# EAGLE board headstage-mech-test (EAGLE 6.5.0)

Size 39.62 x 39.62 mm. Coordinates in mm from the lower left corner, seen from the top.
Outline: circle at 19.81,19.81 radius 19.81
Copper layers (1*16): Top 0.0356mm / dielectric 1.5011mm / Bottom 0.0356mm
Design rules "ohs-park-2-layer": minimum track width 6mil, minimum drill 13mil, track to track 6mil, track to pad 6mil, pad to pad 6mil, via to via 6mil, smd to smd 6mil, copper to edge 15mil, drill to drill 6mil, minimum pad ring 7mil, minimum via ring 7mil, stop-mask expansion 4mil, vias tented up to drill 100mil, thermal gap 10mil
Net classes: 1 thick: width 0.102 mm
Holes 1.27 mm at 10.31,28.7 28.7,29.31 29.31,10.92 10.92,10.31

## Footprints (pad centres in the part's own frame; a part is rotated, then mirrored left to right if it is on the bottom)
DF40-70REC = smd 0.2 x 1.14: 1 -6.8,1.17; 2 -6.4,1.17; 3 -6,1.17; 4 -5.6,1.17; 5 -5.2,1.17; 6 -4.8,1.17; 7 -4.4,1.17; 8 -4,1.17; 9 -3.6,1.17; 10 -3.2,1.17; 11 -2.8,1.17; 12 -2.4,1.17; 13 -2,1.17; 14 -1.6,1.17; 15 -1.2,1.17; 16 -0.8,1.17; 17 -0.4,1.17; 18 0,1.17; 19 0.4,1.17; 20 0.8,1.17; 21 1.2,1.17; 22 1.6,1.17; 23 2,1.17; 24 2.4,1.17; 25 2.8,1.17; 26 3.2,1.17; 27 3.6,1.17; 28 4,1.17; 29 4.4,1.17; 30 4.8,1.17; 31 5.2,1.17; 32 5.6,1.17; 33 6,1.17; 34 6.4,1.17; 35 6.8,1.17; 36 6.8,-1.17; 37 6.4,-1.17; 38 6,-1.17; 39 5.6,-1.17; 40 5.2,-1.17; 41 4.8,-1.17; 42 4.4,-1.17; 43 4,-1.17; 44 3.6,-1.17; 45 3.2,-1.17; 46 2.8,-1.17; 47 2.4,-1.17; 48 2,-1.17; 49 1.6,-1.17; 50 1.2,-1.17; 51 0.8,-1.17; 52 0.4,-1.17; 53 0,-1.17; 54 -0.4,-1.17; 55 -0.8,-1.17; 56 -1.2,-1.17; 57 -1.6,-1.17; 58 -2,-1.17; 59 -2.4,-1.17; 60 -2.8,-1.17; 61 -3.2,-1.17; 62 -3.6,-1.17; 63 -4,-1.17; 64 -4.4,-1.17; 65 -4.8,-1.17; 66 -5.2,-1.17; 67 -5.6,-1.17; 68 -6,-1.17; 69 -6.4,-1.17; 70 -6.8,-1.17
DF40-70HEAD = smd 0.23 x 0.66: 1 -6.8,-1.685; 2 -6.4,-1.685; 3 -6,-1.685; 4 -5.6,-1.685; 5 -5.2,-1.685; 6 -4.8,-1.685; 7 -4.4,-1.685; 8 -4,-1.685; 9 -3.6,-1.685; 10 -3.2,-1.685; 11 -2.8,-1.685; 12 -2.4,-1.685; 13 -2,-1.685; 14 -1.6,-1.685; 15 -1.2,-1.685; 16 -0.8,-1.685; 17 -0.4,-1.685; 18 0,-1.685; 19 0.4,-1.685; 20 0.8,-1.685; 21 1.2,-1.685; 22 1.6,-1.685; 23 2,-1.685; 24 2.4,-1.685; 25 2.8,-1.685; 26 3.2,-1.685; 27 3.6,-1.685; 28 4,-1.685; 29 4.4,-1.685; 30 4.8,-1.685; 31 5.2,-1.685; 32 5.6,-1.685; 33 6,-1.685; 34 6.4,-1.685; 35 6.8,-1.685; 36 6.8,1.685; 37 6.4,1.685; 38 6,1.685; 39 5.6,1.685; 40 5.2,1.685; 41 4.8,1.685; 42 4.4,1.685; 43 4,1.685; 44 3.6,1.685; 45 3.2,1.685; 46 2.8,1.685; 47 2.4,1.685; 48 2,1.685; 49 1.6,1.685; 50 1.2,1.685; 51 0.8,1.685; 52 0.4,1.685; 53 0,1.685; 54 -0.4,1.685; 55 -0.8,1.685; 56 -1.2,1.685; 57 -1.6,1.685; 58 -2,1.685; 59 -2.4,1.685; 60 -2.8,1.685; 61 -3.2,1.685; 62 -3.6,1.685; 63 -4,1.685; 64 -4.4,1.685; 65 -4.8,1.685; 66 -5.2,1.685; 67 -5.6,1.685; 68 -6,1.685; 69 -6.4,1.685; 70 -6.8,1.685 | smd 0.35 x 0.66: M1 -7.275,-1.685; M2 7.275,-1.685; M3 7.275,1.685; M4 -7.275,1.685
0201 = smd 0.432 x 0.432: 1 -0.394,0; 2 0.394,0
0402 = smd 0.686 x 0.762: 1 -0.533,0; 2 0.533,0
DF40-20HEAD = smd 0.23 x 0.66: 1 -1.8,-1.685; 2 -1.4,-1.685; 3 -1,-1.685; 4 -0.6,-1.685; 5 -0.2,-1.685; 6 0.2,-1.685; 7 0.6,-1.685; 8 1,-1.685; 9 1.4,-1.685; 10 1.8,-1.685; 11 1.8,1.685; 12 1.4,1.685; 13 1,1.685; 14 0.6,1.685; 15 0.2,1.685; 16 -0.2,1.685; 17 -0.6,1.685; 18 -1,1.685; 19 -1.4,1.685; 20 -1.8,1.685 | smd 0.35 x 0.66: M1 -2.275,-1.685; M2 2.275,-1.685; M3 2.275,1.685; M4 -2.275,1.685
DF40-20REC = smd 0.2 x 1.14: 1 -1.8,1.17; 2 -1.4,1.17; 3 -1,1.17; 4 -0.6,1.17; 5 -0.2,1.17; 6 0.2,1.17; 7 0.6,1.17; 8 1,1.17; 9 1.4,1.17; 10 1.8,1.17; 11 1.8,-1.17; 12 1.4,-1.17; 13 1,-1.17; 14 0.6,-1.17; 15 0.2,-1.17; 16 -0.2,-1.17; 17 -0.6,-1.17; 18 -1,-1.17; 19 -1.4,-1.17; 20 -1.8,-1.17
RHD2164_COB_MECH = smd 7.722 x 4.674: CENTER 0,0
TESTPOINT_SMALL = drill 0.813 octagon: 1 0,0
OMNETICS_PZN-06-AA = smd 0.381 x 0.762: B1 0.635,-1.016; B2 0,-1.016; B3 -0.635,-1.016 | smd 0.381 x 1.016: T1 0.635,-2.159; T2 0,-2.159; T3 -0.635,-2.159
ADXL335 = smd 0.61 x 0.305: COM1 -1.775,-0.3; NC1 -1.775,1; NC2 -1.775,-0.95; NC3 1.775,-1; NC4 1.775,0.3; ST -1.775,0.35; XOUT 1.775,0.95; YOUT 1.775,-0.35 | smd 0.305 x 0.61: COM2 -1,-1.775; COM3 -0.35,-1.775; COM4 0.3,-1.775; NC5 1,1.775; NC6 -0.95,1.775; VS1 0.35,1.775; VS2 -0.3,1.775; ZOUT 0.95,-1.775
TSSOP-16 = smd 0.348 x 1.397: 1 -2.273,-2.814; 2 -1.623,-2.815; 3 -0.973,-2.815; 4 -0.323,-2.815; 5 0.327,-2.815; 6 0.977,-2.815; 7 1.627,-2.815; 8 2.277,-2.815; 9 2.277,2.825; 10 1.627,2.825; 11 0.977,2.825; 12 0.327,2.825; 13 -0.323,2.825; 14 -0.973,2.825; 15 -1.623,2.825; 16 -2.273,2.825

## Placement (x,y rotation side)
AIN_A  DF40REC  [DF40-70REC]  22.86,32.87 0 bottom
AIN_B  DF40REC  [DF40-70REC]  16.76,6.76 180 bottom
ATHRU_A_BOT  DF40REC  [DF40-70REC]  6.76,22.86 270 bottom
ATHRU_A_TOP  DF40HEAD  [DF40-70HEAD]  6.76,22.86 270 top
ATHRU_B_BOT  DF40REC  [DF40-70REC]  32.87,16.76 90 bottom
ATHRU_B_TOP  DF40HEAD  [DF40-70HEAD]  32.87,16.76 90 top
C1  10n  [0201]  14.02,21.13 0 bottom
C2  .1uF  [0402]  19.76,23.32 0 top
C3  .1uF  [0402]  22.35,26.57 270 top
C4  .1uF  [0402]  19.76,26.06 180 top
C5  .1uF  [0402]  19.76,24.69 180 top
C6  .1uF  [0402]  16,20.98 0 top
C7  10n  [0201]  26.67,18.59 180 bottom
C8  .1uF  [0402]  19.86,16.31 180 top
DIO  DF40HEAD  [DF40-20HEAD]  32.87,29.41 90 top
DTHRU_BOT  DF40REC  [DF40-20REC]  10.21,32.87 0 bottom
DTHRU_TOP  DF40HEAD  [DF40-20HEAD]  10.21,32.87 180 top
E$1  [RHD2164_COB_MECH]  17.02,25.04 0 bottom
E$2  [RHD2164_COB_MECH]  22.61,14.58 0 bottom
GND  GND  [TESTPOINT_SMALL]  36.83,27.18 0 top
GND.  GND  [TESTPOINT_SMALL]  2.79,12.45 0 top
MECH1  DF40HEAD  [DF40-70HEAD]  16.76,6.76 0 top
MECH2  DF40HEAD  [DF40-70HEAD]  22.86,32.87 180 top
MECH3  DF40HEAD  [DF40-20HEAD]  29.41,6.76 0 top
MECH4  DF40HEAD  [DF40-20HEAD]  6.76,10.21 270 top
PLT  PZN-06  [OMNETICS_PZN-06-AA]  2.13,19.2 0 top
R1  100  [0201]  22.91,21.95 0 top
R2  100  [0201]  25.15,21.95 0 top
R3  100  [0201]  27.18,21.95 0 top
R4  0  [0402]  12.09,11.63 180 bottom
R5  100k  [0201]  9.65,21.03 270 bottom
R6  100k  [0201]  10.62,21.03 270 bottom
R7  100k  [0201]  11.58,21.03 270 bottom
REF1  REF  [TESTPOINT_SMALL]  7.26,6.05 0 top
REF2  REF  [TESTPOINT_SMALL]  32.36,33.58 0 top
U1  ADXL335  [ADXL335]  15.95,24.69 0 top
U2  74HC4053  [TSSOP-16]  13.31,16.05 0 bottom
VCC1  VCC  [TESTPOINT_SMALL]  37.59,25.25 0 top
VCC2  VCC  [TESTPOINT_SMALL]  2.03,14.38 0 top

## Library data of the parts
AIN_A AIN_B ATHRU_A_BOT ATHRU_A_TOP ATHRU_B_BOT ATHRU_B_TOP C4-C6 DIO DTHRU_BOT DTHRU_TOP E$1 E$2 GND GND. MECH1-MECH4 PLT R1-R3 REF1 REF2 U1 U2 VCC1 VCC2 = jonnew
C1 C2 C7 C8 R4-R7 = RHD2000_eval_board
C3 = headstage

## Nets
AGND_THRU_1: ATHRU_A_BOT.34 ATHRU_A_BOT.35 ATHRU_A_TOP.34 ATHRU_A_TOP.35
AGND_THRU_2: ATHRU_A_BOT.69 ATHRU_A_BOT.70 ATHRU_A_TOP.69 ATHRU_A_TOP.70
AGND_THRU_3 [thick]: ATHRU_B_BOT.34 ATHRU_B_BOT.35 ATHRU_B_TOP.34 ATHRU_B_TOP.35
AGND_THRU_4: ATHRU_B_BOT.69 ATHRU_B_BOT.70 ATHRU_B_TOP.69 ATHRU_B_TOP.70
AUXOUT_A_THRU: DTHRU_BOT.4 DTHRU_TOP.4
AUXOUT_B: DIO.4
AUXOUT_B_THRU: DTHRU_BOT.5 DTHRU_TOP.5
BATH [thick]: PLT.B1 U2.3
CS+: DIO.12 R1.2
CS+_THRU: DTHRU_BOT.12 DTHRU_TOP.12
CS-: DIO.11 R1.1
CS-_THRU: DTHRU_BOT.11 DTHRU_TOP.11
DGND_THRU: DTHRU_BOT.1 DTHRU_BOT.2 DTHRU_BOT.3 DTHRU_BOT.6 DTHRU_BOT.7 DTHRU_BOT.8 DTHRU_BOT.9 DTHRU_TOP.1 DTHRU_TOP.2 DTHRU_TOP.3 DTHRU_TOP.6 DTHRU_TOP.7 DTHRU_TOP.8 DTHRU_TOP.9
ELEC_TEST1: U2.14
ELEC_TEST2: U2.15
GND [thick]: AIN_A.34 AIN_A.35 AIN_A.69 AIN_A.70 AIN_B.34 AIN_B.35 AIN_B.69 AIN_B.70 C1.2 C2.2 C3.2 C4.1 C5.1 C6.1 C7.2 C8.2 DIO.1 DIO.2 DIO.3 DIO.5 DIO.6 DIO.7 GND.1 GND..1 PLT.B3 R4.1 R5.1 R6.1 R7.1 U1.COM1 U1.COM2 U1.COM3 U1.COM4 U1.ST U2.6 U2.7 U2.8
MISO1+: DIO.20
MISO1+_THRU: DTHRU_BOT.18 DTHRU_TOP.18
MISO1-: DIO.19
MISO1-_THRU: DTHRU_BOT.17 DTHRU_TOP.17
MISO2+: DIO.18
MISO2+_THRU: DTHRU_BOT.20 DTHRU_TOP.20
MISO2-: DIO.17
MISO2-_THRU: DTHRU_BOT.19 DTHRU_TOP.19
MOSI+: DIO.16 R3.2
MOSI+_THRU: DTHRU_BOT.16 DTHRU_TOP.16
MOSI-: DIO.15 R3.1
MOSI-_THRU: DTHRU_BOT.15 DTHRU_TOP.15
N$1 [thick]: C7.1
N$2: AIN_A.38
N$3: AIN_A.39
N$4: AIN_A.40
N$5: AIN_A.41
N$6: AIN_A.42
N$7: AIN_A.32
N$8: AIN_A.31
N$9: AIN_A.30
N$10: AIN_A.29
N$11: AIN_B.38
N$12: AIN_A.28
N$13: AIN_A.27
N$14: AIN_A.26
N$15: AIN_A.25
N$16: AIN_A.24
N$17: AIN_A.23
N$18: AIN_A.22
N$19: AIN_A.21
N$20: AIN_A.20
N$21: AIN_A.19
N$22: AIN_A.18
N$23: AIN_A.17
N$24: AIN_A.16
N$25: AIN_A.15
N$26: AIN_A.14
N$27: AIN_A.13
N$28: AIN_A.12
N$29: AIN_A.11
N$30: AIN_A.10
N$31: AIN_A.9
N$32: AIN_A.8
N$33: AIN_A.7
N$34: AIN_A.6
N$35: AIN_B.39
N$36: AIN_B.40
N$37: AIN_B.41
N$38: AIN_B.42
N$39: AIN_B.43
N$40: AIN_B.44
N$41: AIN_A.5
N$42 [thick]: C1.1
N$43: AIN_A.4
N$44: AIN_A.3
N$45: AIN_A.2
N$46: AIN_A.33
N$47: AIN_B.45
N$48: AIN_B.46
N$49: AIN_B.47
N$50: AIN_B.48
N$51: AIN_B.49
N$52: AIN_B.50
N$53: AIN_B.51
N$54: AIN_B.52
N$55: AIN_B.53
N$56: AIN_B.54
N$57: AIN_B.55
N$58: AIN_B.56
N$59: AIN_B.57
N$60: AIN_B.58
N$61: AIN_B.59
N$62: AIN_B.60
N$63: AIN_B.61
N$64: AIN_B.62
N$65: AIN_B.63
N$66: AIN_B.64
N$67: AIN_B.65
N$68: AIN_B.66
N$69: AIN_B.67
N$70: AIN_A.43
N$71: AIN_A.44
N$72: AIN_A.45
N$73: AIN_A.46
N$74: AIN_B.68
N$75: AIN_B.37
N$76: AIN_B.32
N$77: AIN_B.31
N$78: AIN_B.30
N$79: AIN_B.29
N$80: AIN_B.28
N$81: AIN_B.27
N$82: AIN_B.26
N$83: AIN_B.25
N$84: AIN_B.24
N$85: AIN_B.23
N$86: AIN_B.22
N$87: AIN_B.21
N$88: AIN_B.20
N$89: AIN_B.19
N$90: AIN_B.18
N$91: AIN_B.17
N$92: AIN_B.16
N$93: AIN_B.15
N$94: AIN_B.14
N$95: AIN_B.13
N$96: AIN_B.12
N$97: AIN_B.11
N$98: AIN_B.10
N$99: AIN_B.9
N$100: AIN_B.8
N$101: AIN_B.7
N$102: AIN_B.6
N$103: AIN_B.5
N$104: AIN_B.4
N$105: AIN_B.3
N$106: AIN_B.2
N$107: AIN_B.33
N$108: ATHRU_B_BOT.33 ATHRU_B_TOP.33
N$109: ATHRU_B_BOT.32 ATHRU_B_TOP.32
N$110: ATHRU_B_BOT.31 ATHRU_B_TOP.31
N$111: ATHRU_B_BOT.30 ATHRU_B_TOP.30
N$112: ATHRU_B_BOT.29 ATHRU_B_TOP.29
N$113: ATHRU_B_BOT.28 ATHRU_B_TOP.28
N$114: ATHRU_B_BOT.27 ATHRU_B_TOP.27
N$115: ATHRU_B_BOT.26 ATHRU_B_TOP.26
N$116: ATHRU_B_BOT.25 ATHRU_B_TOP.25
N$117: ATHRU_B_BOT.24 ATHRU_B_TOP.24
N$118: ATHRU_B_BOT.23 ATHRU_B_TOP.23
N$119: ATHRU_B_BOT.22 ATHRU_B_TOP.22
N$120: ATHRU_B_BOT.21 ATHRU_B_TOP.21
N$121: ATHRU_B_BOT.20 ATHRU_B_TOP.20
N$122: ATHRU_B_BOT.19 ATHRU_B_TOP.19
N$123: ATHRU_B_BOT.18 ATHRU_B_TOP.18
N$124: ATHRU_B_BOT.17 ATHRU_B_TOP.17
N$125: ATHRU_B_BOT.16 ATHRU_B_TOP.16
N$126: ATHRU_B_BOT.15 ATHRU_B_TOP.15
N$127: ATHRU_B_BOT.14 ATHRU_B_TOP.14
N$128: ATHRU_B_BOT.13 ATHRU_B_TOP.13
N$129: ATHRU_B_BOT.12 ATHRU_B_TOP.12
N$130: ATHRU_B_BOT.11 ATHRU_B_TOP.11
N$131: PLT.T1 R7.2 U2.11
N$132: PLT.T2 R6.2 U2.10
N$133: PLT.T3 R5.2 U2.9
N$134 [thick]: R4.2 U2.5
N$136: PLT.B2 U2.1 U2.13
N$137: AIN_A.47
N$138: AIN_A.48
N$139: AIN_A.49
N$140: AIN_A.50
N$141: AIN_A.51
N$142: AIN_A.52
N$143: AIN_A.53
N$144: AIN_A.54
N$145: AIN_A.55
N$146: AIN_A.56
N$147: AIN_A.57
N$148: AIN_A.58
N$149: AIN_A.59
N$150: AIN_A.60
N$151: AIN_A.61
N$152: AIN_A.62
N$153: AIN_A.63
N$154: AIN_A.64
N$155: AIN_A.65
N$156: AIN_A.66
N$157: ATHRU_B_BOT.10 ATHRU_B_TOP.10
N$158: ATHRU_B_BOT.9 ATHRU_B_TOP.9
N$159: ATHRU_B_BOT.8 ATHRU_B_TOP.8
N$160: ATHRU_B_BOT.7 ATHRU_B_TOP.7
N$161: ATHRU_B_BOT.6 ATHRU_B_TOP.6
N$162: AIN_A.37
N$163: ATHRU_B_BOT.5 ATHRU_B_TOP.5
N$164: ATHRU_B_BOT.4 ATHRU_B_TOP.4
N$165: ATHRU_B_BOT.3 ATHRU_B_TOP.3
N$166: ATHRU_B_BOT.2 ATHRU_B_TOP.2
N$167: ATHRU_B_BOT.38 ATHRU_B_TOP.38
N$168: ATHRU_B_BOT.39 ATHRU_B_TOP.39
N$169: ATHRU_B_BOT.40 ATHRU_B_TOP.40
N$170: ATHRU_B_BOT.41 ATHRU_B_TOP.41
N$171: ATHRU_B_BOT.42 ATHRU_B_TOP.42
N$172: ATHRU_B_BOT.43 ATHRU_B_TOP.43
N$173: ATHRU_B_BOT.44 ATHRU_B_TOP.44
N$174: ATHRU_B_BOT.45 ATHRU_B_TOP.45
N$175: ATHRU_B_BOT.46 ATHRU_B_TOP.46
N$176: ATHRU_B_BOT.47 ATHRU_B_TOP.47
N$177: ATHRU_B_BOT.48 ATHRU_B_TOP.48
N$178: ATHRU_B_BOT.49 ATHRU_B_TOP.49
N$179: ATHRU_B_BOT.50 ATHRU_B_TOP.50
N$180: ATHRU_B_BOT.51 ATHRU_B_TOP.51
N$181: ATHRU_B_BOT.52 ATHRU_B_TOP.52
N$182: ATHRU_B_BOT.53 ATHRU_B_TOP.53
N$183: ATHRU_B_BOT.54 ATHRU_B_TOP.54
N$184: ATHRU_B_BOT.55 ATHRU_B_TOP.55
N$185: ATHRU_B_BOT.56 ATHRU_B_TOP.56
N$186: ATHRU_B_BOT.57 ATHRU_B_TOP.57
N$187: ATHRU_B_BOT.58 ATHRU_B_TOP.58
N$188: ATHRU_B_BOT.59 ATHRU_B_TOP.59
N$189: ATHRU_B_BOT.60 ATHRU_B_TOP.60
N$190: ATHRU_B_BOT.61 ATHRU_B_TOP.61
N$191: ATHRU_B_BOT.62 ATHRU_B_TOP.62
N$192: ATHRU_B_BOT.63 ATHRU_B_TOP.63
N$193: ATHRU_B_BOT.64 ATHRU_B_TOP.64
N$194: ATHRU_B_BOT.65 ATHRU_B_TOP.65
N$195: ATHRU_B_BOT.66 ATHRU_B_TOP.66
N$196: ATHRU_B_BOT.67 ATHRU_B_TOP.67
N$197: ATHRU_B_BOT.68 ATHRU_B_TOP.68
N$199: ATHRU_A_BOT.33 ATHRU_A_TOP.33
N$200: ATHRU_A_BOT.32 ATHRU_A_TOP.32
N$201: ATHRU_A_BOT.31 ATHRU_A_TOP.31
N$202: ATHRU_A_BOT.30 ATHRU_A_TOP.30
N$203: ATHRU_A_BOT.29 ATHRU_A_TOP.29
N$204: ATHRU_A_BOT.28 ATHRU_A_TOP.28
N$205: ATHRU_A_BOT.27 ATHRU_A_TOP.27
N$206: ATHRU_A_BOT.26 ATHRU_A_TOP.26
N$207: ATHRU_A_BOT.25 ATHRU_A_TOP.25
N$208: ATHRU_A_BOT.24 ATHRU_A_TOP.24
N$209: ATHRU_A_BOT.23 ATHRU_A_TOP.23
N$210: ATHRU_A_BOT.22 ATHRU_A_TOP.22
N$211: ATHRU_A_BOT.21 ATHRU_A_TOP.21
N$212: ATHRU_A_BOT.20 ATHRU_A_TOP.20
N$213: ATHRU_A_BOT.19 ATHRU_A_TOP.19
N$214: ATHRU_A_BOT.18 ATHRU_A_TOP.18
N$215: ATHRU_A_BOT.17 ATHRU_A_TOP.17
N$216: ATHRU_A_BOT.16 ATHRU_A_TOP.16
N$217: ATHRU_A_BOT.15 ATHRU_A_TOP.15
N$218: ATHRU_A_BOT.14 ATHRU_A_TOP.14
N$219: ATHRU_A_BOT.13 ATHRU_A_TOP.13
N$220: ATHRU_A_BOT.12 ATHRU_A_TOP.12
N$221: ATHRU_A_BOT.11 ATHRU_A_TOP.11
N$222: ATHRU_A_BOT.10 ATHRU_A_TOP.10
N$223: ATHRU_A_BOT.9 ATHRU_A_TOP.9
N$224: ATHRU_A_BOT.8 ATHRU_A_TOP.8
N$225: ATHRU_A_BOT.7 ATHRU_A_TOP.7
N$226: ATHRU_A_BOT.6 ATHRU_A_TOP.6
N$227: ATHRU_A_BOT.5 ATHRU_A_TOP.5
N$228: ATHRU_A_BOT.4 ATHRU_A_TOP.4
N$229: ATHRU_A_BOT.3 ATHRU_A_TOP.3
N$230: ATHRU_A_BOT.2 ATHRU_A_TOP.2
N$231: ATHRU_A_BOT.38 ATHRU_A_TOP.38
N$232: ATHRU_A_BOT.39 ATHRU_A_TOP.39
N$233: ATHRU_A_BOT.40 ATHRU_A_TOP.40
N$234: ATHRU_A_BOT.41 ATHRU_A_TOP.41
N$235: ATHRU_A_BOT.42 ATHRU_A_TOP.42
N$236: ATHRU_A_BOT.43 ATHRU_A_TOP.43
N$237: ATHRU_A_BOT.44 ATHRU_A_TOP.44
N$238: ATHRU_A_BOT.45 ATHRU_A_TOP.45
N$239: ATHRU_A_BOT.46 ATHRU_A_TOP.46
N$240: ATHRU_A_BOT.47 ATHRU_A_TOP.47
N$241: ATHRU_A_BOT.48 ATHRU_A_TOP.48
N$242: ATHRU_A_BOT.49 ATHRU_A_TOP.49
N$243: ATHRU_A_BOT.50 ATHRU_A_TOP.50
N$244: ATHRU_A_BOT.51 ATHRU_A_TOP.51
N$245: ATHRU_A_BOT.52 ATHRU_A_TOP.52
N$246: ATHRU_A_BOT.53 ATHRU_A_TOP.53
N$247: ATHRU_A_BOT.54 ATHRU_A_TOP.54
N$248: ATHRU_A_BOT.55 ATHRU_A_TOP.55
N$249: ATHRU_A_BOT.56 ATHRU_A_TOP.56
N$250: ATHRU_A_BOT.57 ATHRU_A_TOP.57
N$251: ATHRU_A_BOT.58 ATHRU_A_TOP.58
N$252: ATHRU_A_BOT.59 ATHRU_A_TOP.59
N$253: ATHRU_A_BOT.60 ATHRU_A_TOP.60
N$254: ATHRU_A_BOT.61 ATHRU_A_TOP.61
N$255: ATHRU_A_BOT.62 ATHRU_A_TOP.62
N$256: ATHRU_A_BOT.63 ATHRU_A_TOP.63
N$257: ATHRU_A_BOT.64 ATHRU_A_TOP.64
N$258: ATHRU_A_BOT.65 ATHRU_A_TOP.65
N$259: ATHRU_A_BOT.66 ATHRU_A_TOP.66
N$260: ATHRU_A_BOT.67 ATHRU_A_TOP.67
N$261: ATHRU_A_BOT.68 ATHRU_A_TOP.68
N$262: ATHRU_B_BOT.37 ATHRU_B_TOP.37
N$450: AIN_A.68
N$451: AIN_A.67
N$1000: ATHRU_A_BOT.37 ATHRU_A_TOP.37
REF: AIN_A.1 AIN_A.36 AIN_B.1 AIN_B.36 REF1.1 REF2.1 U2.4
REF_THRU_1: ATHRU_A_BOT.36 ATHRU_A_TOP.36
REF_THRU_2: ATHRU_A_BOT.1 ATHRU_A_TOP.1
REF_THRU_3: ATHRU_B_BOT.36 ATHRU_B_TOP.36
REF_THRU_4: ATHRU_B_BOT.1 ATHRU_B_TOP.1
SCLK+: DIO.14 R2.2
SCLK+_THRU: DTHRU_BOT.14 DTHRU_TOP.14
SCLK-: DIO.13 R2.1
SCLK-_THRU: DTHRU_BOT.13 DTHRU_TOP.13
VCC [thick]: C2.1 C3.1 C8.1 DIO.8 DIO.9 DIO.10 U1.VS1 U1.VS2 U2.16 VCC1.1 VCC2.1
VDD_THRU: DTHRU_BOT.10 DTHRU_TOP.10
XOUT1: C4.2 U1.XOUT
YOUT1: C5.2 U1.YOUT
ZOUT1: C6.2 U1.ZOUT

## Tracks (layer width: path | path; a pad name or v marks a point on that pad's centre or on a via)
AGND_THRU_1  (3 unrouted)
AGND_THRU_2  (3 unrouted)
AGND_THRU_3  (3 unrouted)
AGND_THRU_4  (3 unrouted)
AUXOUT_A_THRU  (1 unrouted)
AUXOUT_B_THRU  (1 unrouted)
BATH  (1 unrouted)
CS+  (1 unrouted)
CS+_THRU  (1 unrouted)
CS-  (1 unrouted)
CS-_THRU  (1 unrouted)
DGND_THRU  (13 unrouted)
GND  (35 unrouted)
MISO1+_THRU  (1 unrouted)
MISO1-_THRU  (1 unrouted)
MISO2+_THRU  (1 unrouted)
MISO2-_THRU  (1 unrouted)
MOSI+  (1 unrouted)
MOSI+_THRU  (1 unrouted)
MOSI-  (1 unrouted)
MOSI-_THRU  (1 unrouted)
N$108  (1 unrouted)
N$109  (1 unrouted)
N$110  (1 unrouted)
N$111  (1 unrouted)
N$112  (1 unrouted)
N$113  (1 unrouted)
N$114  (1 unrouted)
N$115  (1 unrouted)
N$116  (1 unrouted)
N$117  (1 unrouted)
N$118  (1 unrouted)
N$119  (1 unrouted)
N$120  (1 unrouted)
N$121  (1 unrouted)
N$122  (1 unrouted)
N$123  (1 unrouted)
N$124  (1 unrouted)
N$125  (1 unrouted)
N$126  (1 unrouted)
N$127  (1 unrouted)
N$128  (1 unrouted)
N$129  (1 unrouted)
N$130  (1 unrouted)
N$131  (2 unrouted)
N$132  (2 unrouted)
N$133  (2 unrouted)
N$134  (1 unrouted)
N$136  (2 unrouted)
N$157  (1 unrouted)
N$158  (1 unrouted)
N$159  (1 unrouted)
N$160  (1 unrouted)
N$161  (1 unrouted)
N$163  (1 unrouted)
N$164  (1 unrouted)
N$165  (1 unrouted)
N$166  (1 unrouted)
N$167  (1 unrouted)
N$168  (1 unrouted)
N$169  (1 unrouted)
N$170  (1 unrouted)
N$171  (1 unrouted)
N$172  (1 unrouted)
N$173  (1 unrouted)
N$174  (1 unrouted)
N$175  (1 unrouted)
N$176  (1 unrouted)
N$177  (1 unrouted)
N$178  (1 unrouted)
N$179  (1 unrouted)
N$180  (1 unrouted)
N$181  (1 unrouted)
N$182  (1 unrouted)
N$183  (1 unrouted)
N$184  (1 unrouted)
N$185  (1 unrouted)
N$186  (1 unrouted)
N$187  (1 unrouted)
N$188  (1 unrouted)
N$189  (1 unrouted)
N$190  (1 unrouted)
N$191  (1 unrouted)
N$192  (1 unrouted)
N$193  (1 unrouted)
N$194  (1 unrouted)
N$195  (1 unrouted)
N$196  (1 unrouted)
N$197  (1 unrouted)
N$199  (1 unrouted)
N$200  (1 unrouted)
N$201  (1 unrouted)
N$202  (1 unrouted)
N$203  (1 unrouted)
N$204  (1 unrouted)
N$205  (1 unrouted)
N$206  (1 unrouted)
N$207  (1 unrouted)
N$208  (1 unrouted)
N$209  (1 unrouted)
N$210  (1 unrouted)
N$211  (1 unrouted)
N$212  (1 unrouted)
N$213  (1 unrouted)
N$214  (1 unrouted)
N$215  (1 unrouted)
N$216  (1 unrouted)
N$217  (1 unrouted)
N$218  (1 unrouted)
N$219  (1 unrouted)
N$220  (1 unrouted)
N$221  (1 unrouted)
N$222  (1 unrouted)
N$223  (1 unrouted)
N$224  (1 unrouted)
N$225  (1 unrouted)
N$226  (1 unrouted)
N$227  (1 unrouted)
N$228  (1 unrouted)
N$229  (1 unrouted)
N$230  (1 unrouted)
N$231  (1 unrouted)
N$232  (1 unrouted)
N$233  (1 unrouted)
N$234  (1 unrouted)
N$235  (1 unrouted)
N$236  (1 unrouted)
N$237  (1 unrouted)
N$238  (1 unrouted)
N$239  (1 unrouted)
N$240  (1 unrouted)
N$241  (1 unrouted)
N$242  (1 unrouted)
N$243  (1 unrouted)
N$244  (1 unrouted)
N$245  (1 unrouted)
N$246  (1 unrouted)
N$247  (1 unrouted)
N$248  (1 unrouted)
N$249  (1 unrouted)
N$250  (1 unrouted)
N$251  (1 unrouted)
N$252  (1 unrouted)
N$253  (1 unrouted)
N$254  (1 unrouted)
N$255  (1 unrouted)
N$256  (1 unrouted)
N$257  (1 unrouted)
N$258  (1 unrouted)
N$259  (1 unrouted)
N$260  (1 unrouted)
N$261  (1 unrouted)
N$262  (1 unrouted)
N$1000  (1 unrouted)
REF  (6 unrouted)
REF_THRU_1  (1 unrouted)
REF_THRU_2  (1 unrouted)
REF_THRU_3  (1 unrouted)
REF_THRU_4  (1 unrouted)
SCLK+  (1 unrouted)
SCLK+_THRU  (1 unrouted)
SCLK-  (1 unrouted)
SCLK-_THRU  (1 unrouted)
VCC  (9 unrouted)
VDD_THRU  (1 unrouted)
XOUT1  (1 unrouted)
YOUT1  (1 unrouted)
ZOUT1  (1 unrouted)

## Text on the board
tPlace: 128 Channel / Headstage Module | Rev. 1.0 / CC BY-SA-NC-4.0 / JPN, MWL@MIT / 2015-01